# Altium PCB SmartKey.PcbDoc
Units mm, origin at the board's own origin, x right, y up, seen from the top; angles counter-clockwise.
Board outline 60 x 60 mm, 2 copper layers (Top Layer, Bottom Layer); 60 components, 34 nets, 176 pads, 1 vias.
Unrouted connection lines stored in the file: 108.
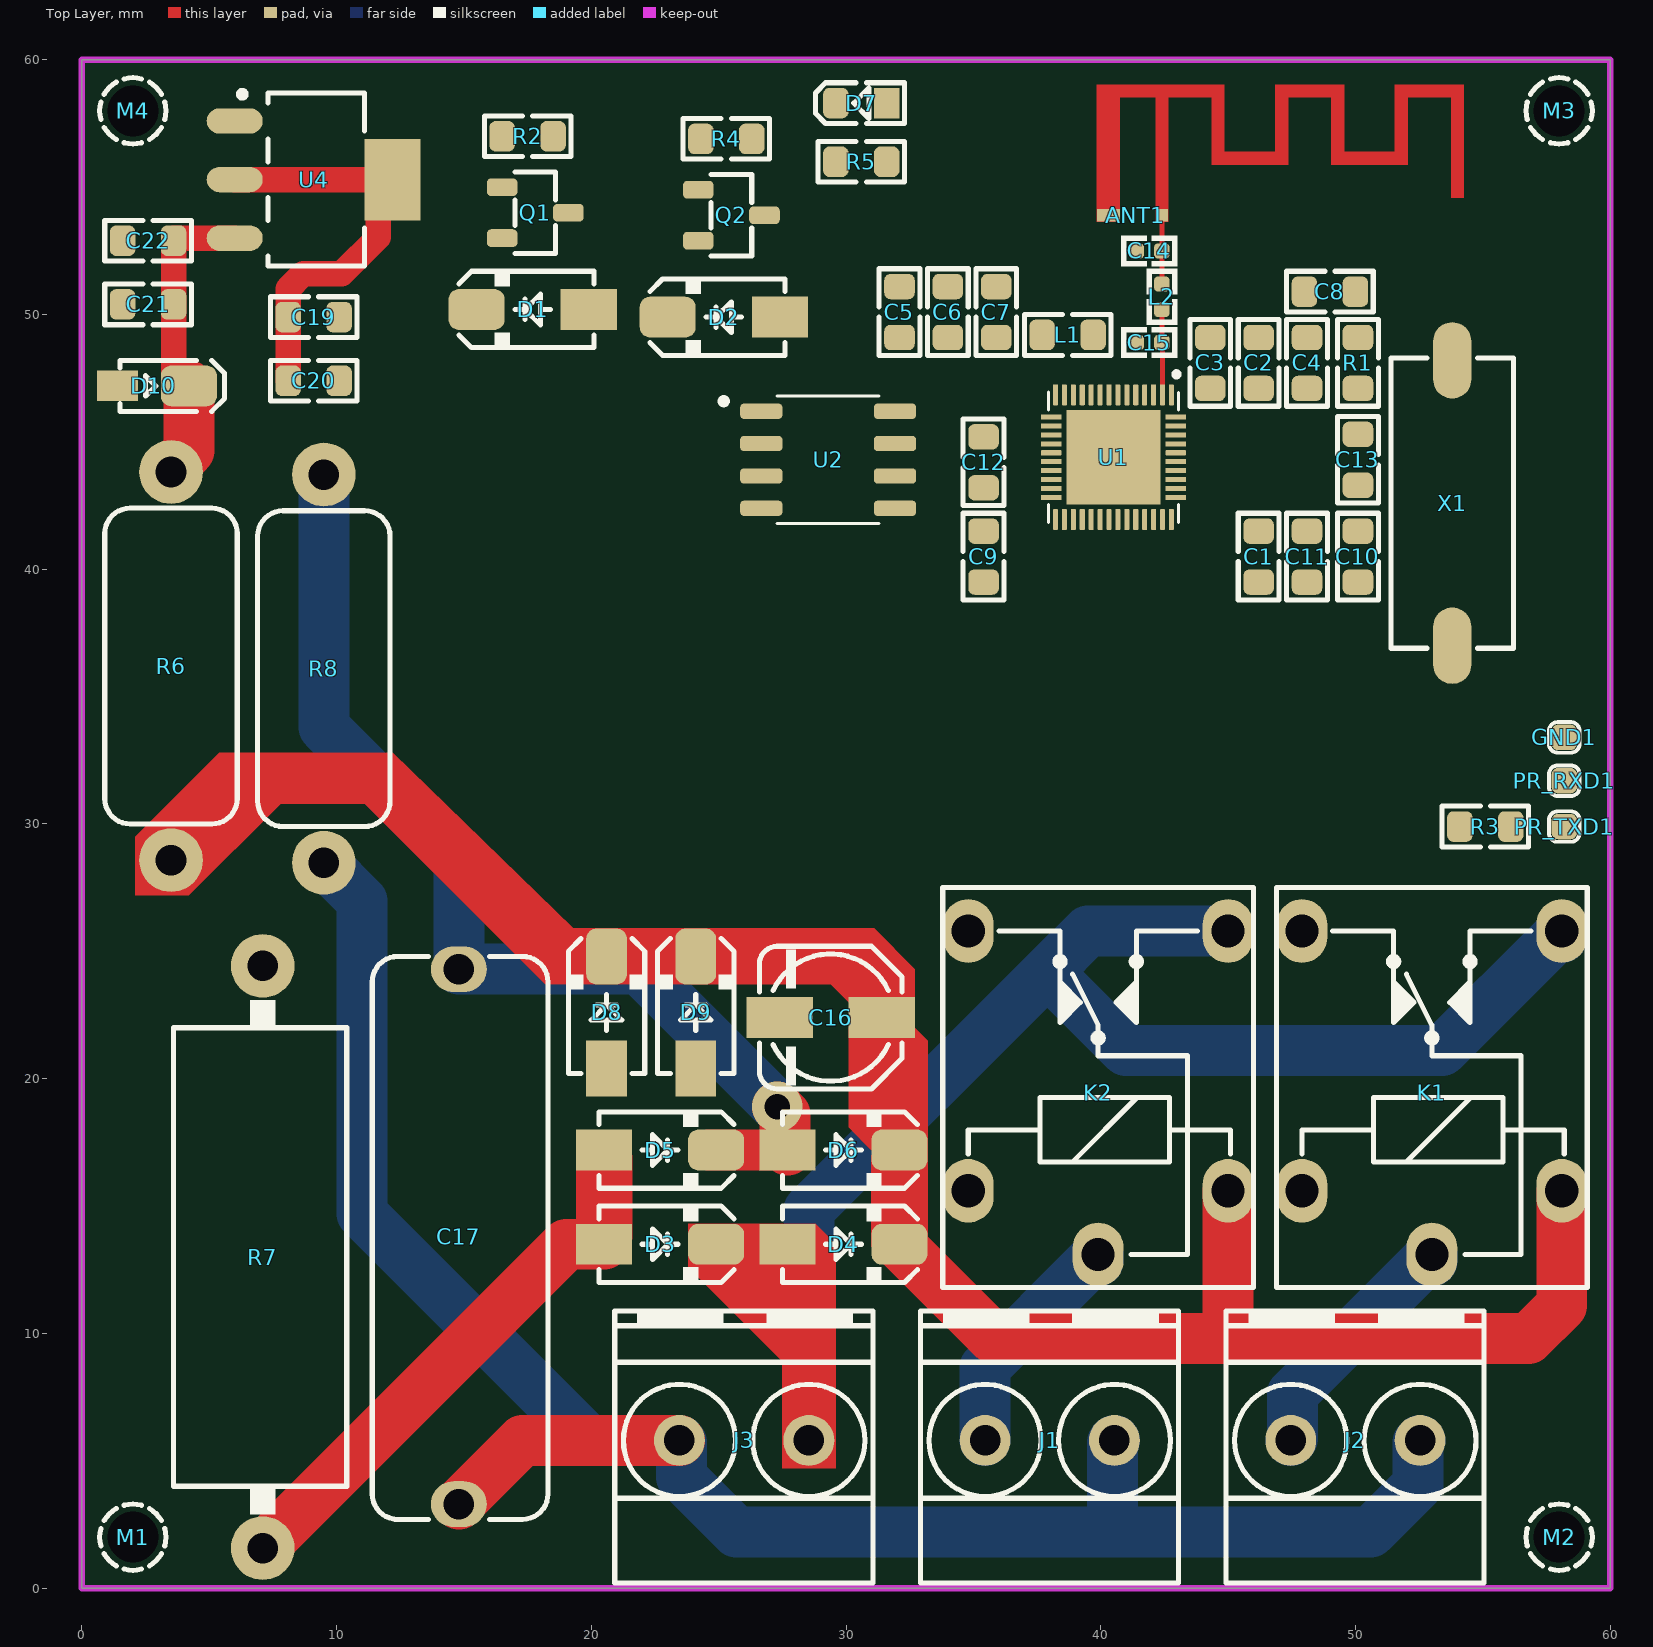
[diagram p0: Top Layer view]
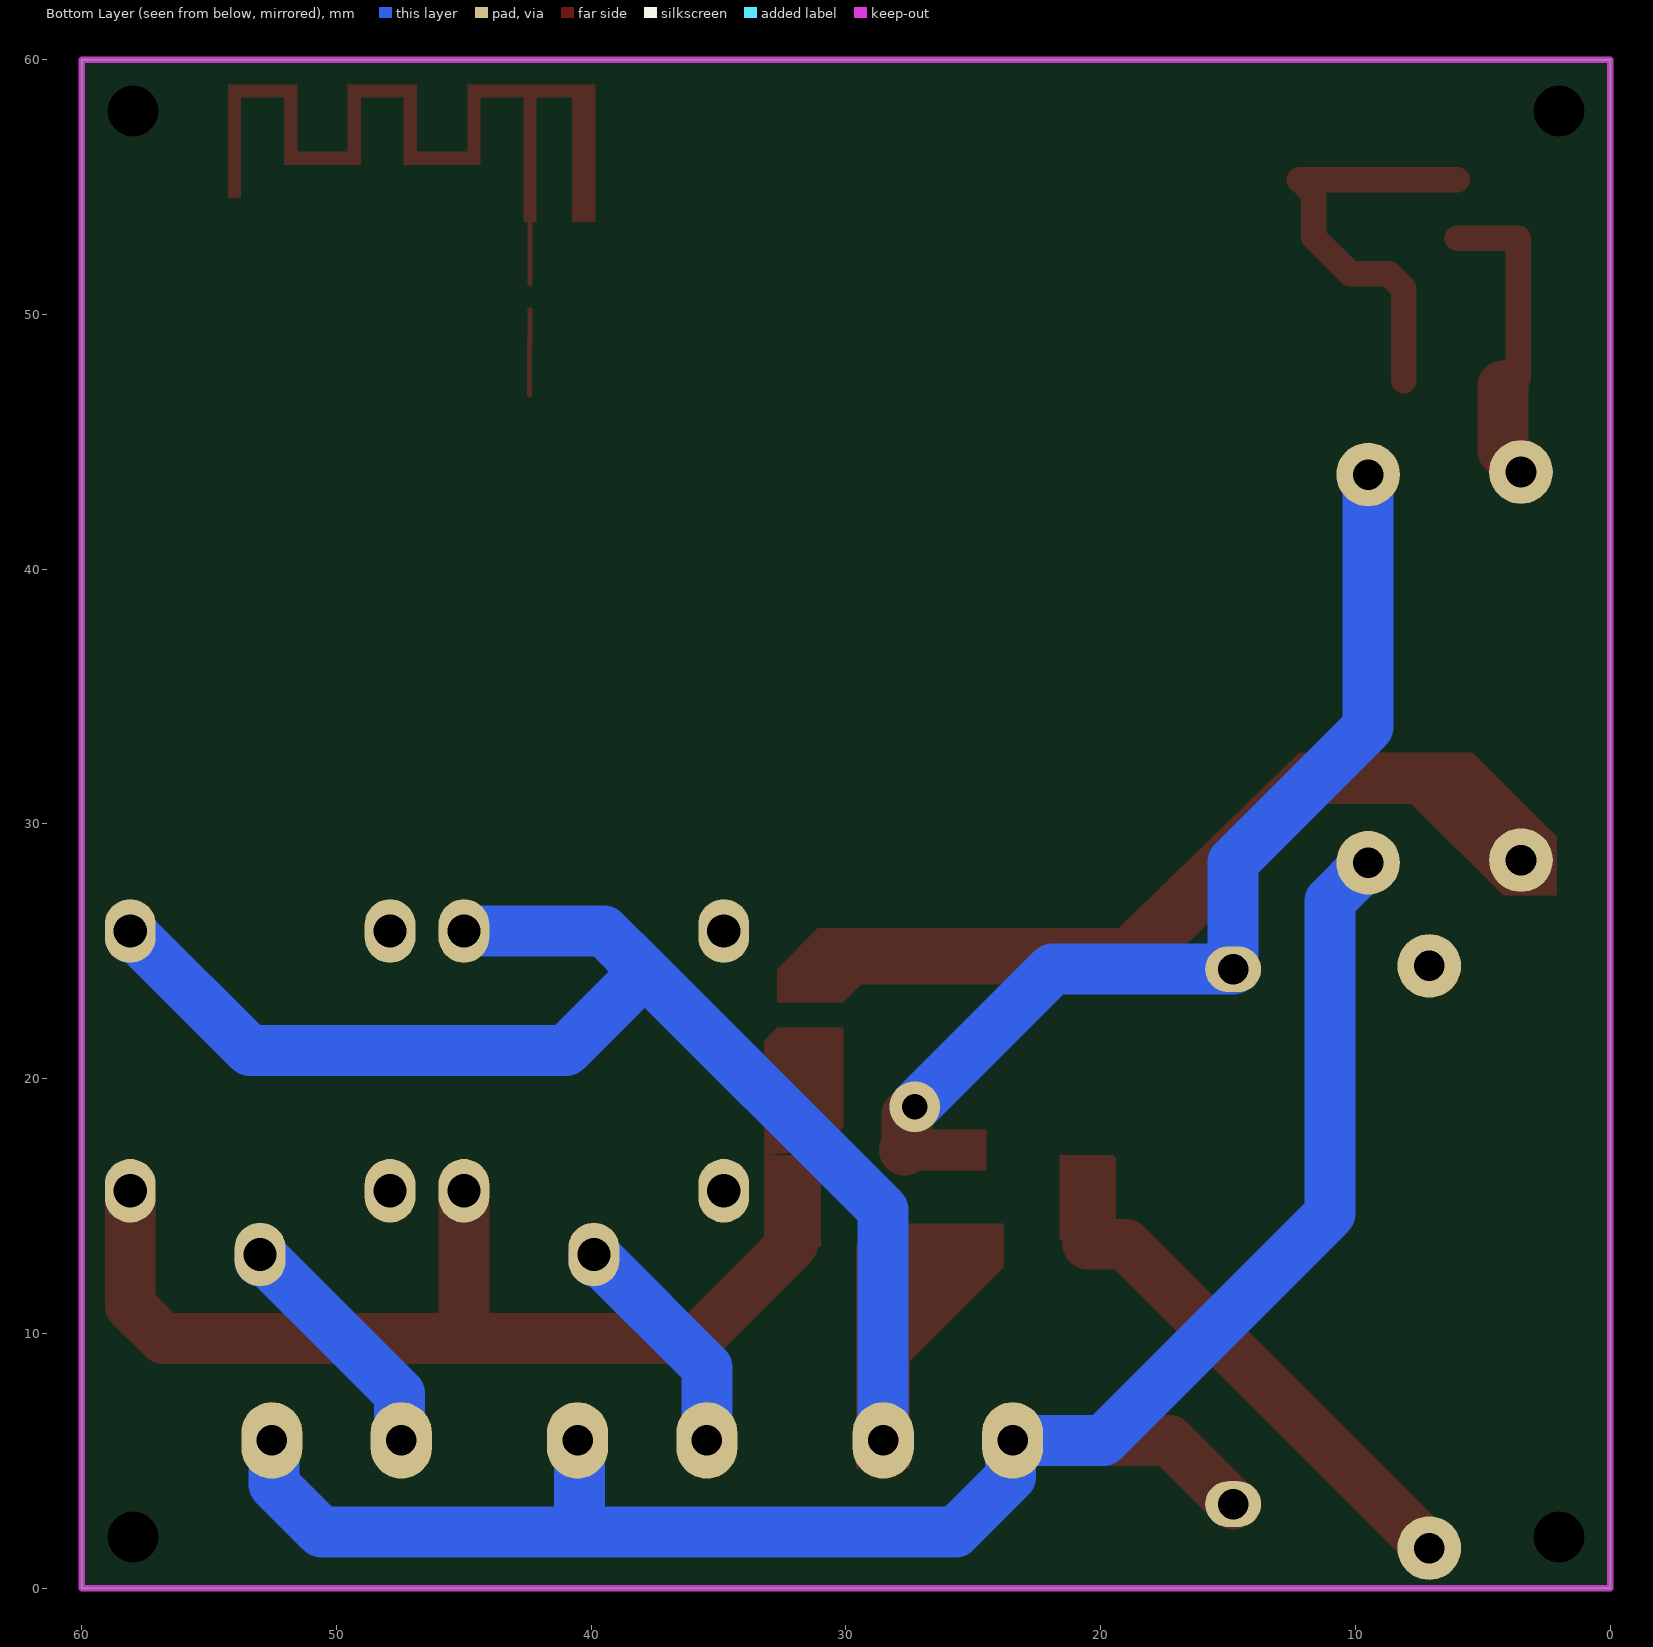
[diagram p1: Bottom Layer view, seen from below]

## Layer stack, top to bottom
Top Solder: solder mask 0.0102, Solder Resist, Dk 3.5
Top Layer: signal copper 0.0356
Dielectric 1: dielectric 0.32, FR-4, Dk 4.8
Bottom Layer: signal copper 0.0356
Bottom Solder: solder mask 0.0102, Solder Resist, Dk 3.5

## Board outline
0,0 60,0 60,60 0,60

## Design rules (kind name [scope] priority, off if disabled: settings)
Clearance [All] p1: gap=0.15 ignorepadtopadclearanceinfootprint=FALSE
DiffPairsRouting [All] p1: maxlimit=0.3 minlimit=0.2 mostfreqgap=0.3 toplayer_minwidth=0.2 toplayer_maxwidth=0.3 toplayer_prefwidth=0.3 bottomlayer_minwidth=0.2 bottomlayer_maxwidth=0.3 bottomlayer_prefwidth=0.3 maxuncoupledlength=12.7
HoleSize [All] p1: absolutevalues=TRUE maxlimit=10 minlimit=0.5 maxpercent=80.000 minpercent=20.000
HoleToHoleClearance [All] p1: gap=0.3 allowstackedmicrovias=TRUE
PlaneClearance [All] p1: clearance=0.3
PlaneConnect [All] p1: pad.planeconnectstyle=Relief pad.reliefexpansion=0.5 pad.reliefentries=4 pad.reliefconductorwidth=0.4 pad.reliefairgap=0.3 via.planeconnectstyle=Direct via.reliefexpansion=0.5 via.reliefentries=4 via.reliefconductorwidth=0.4 via.reliefairgap=0.3
PolygonConnect PolygonConnect_Via [All vs IsVia] p1: connectstyle=Direct reliefconductorwidth=0.254 reliefentries=4 polygonreliefangle="90 Angle" airgapwidth=0.254
PolygonConnect PolygonConnect_Pad [All] p2: thpad.connectstyle=Relief thpad.reliefconductorwidth=0.4 thpad.reliefentries=4 thpad.polygonreliefangle="90 Angle" thpad.airgapwidth=0.3 smdpad.connectstyle=Direct smdpad.reliefconductorwidth=0.4 smdpad.reliefentries=4 smdpad.polygonreliefangle="90 Angle" smdpad.airgapwidth=0.3 via.connectstyle=Relief via.reliefconductorwidth=0.4 via.reliefentries=4 via.polygonreliefangle="90 Angle" via.airgapwidth=0.3
RoutingVias [All] p1: holewidth=0.3 width=0.5 viastyle="Through Hole" minholewidth=0.3 minwidth=0.5 maxholewidth=5 maxwidth=10
SolderMaskExpansion [All] p1: expansion=0.102 istentingtop=FALSE
Width [All] p1: maxlimit=10 minlimit=0.15 preferedwidth=0.15
25 further rules are at their usual default settings.

## Components (designator, comment, footprint, x,y, rotation, side; value= is the part's Value field where it differs from the comment)
ANT1 "Antenna" ANT_PCB_2P4G_IFA 42.4,53.9 r0 top net-tie
C1 "100nF" C0805 46.2,40.5 r90 top
C2 "1uF" C0805 46.2,48.1 r90 top
C3 "10uF" C0805 44.3,48.1 r90 top
C4 "3.3nF" C0805 48.1,48.1 r270 top
C5 "100nF" C0805 32.1,50.1 r90 top
C6 "1uF" C0805 34,50.1 r90 top
C7 "10uF" C0805 35.9,50.1 r90 top
C8 "10nF" C0805 49,50.9 r180 top
C9 "1uF" C0805 35.4,40.499 r90 top
C10 "22uF" C0805 50.1,40.5 r270 top
C11 "100nF" C0805 48.099,40.5 r90 top
C12 "100nF" C0805 35.4,44.2 r90 top
C13 "22uF" C0805 50.1,44.3 r90 top
C14 "TBD" C0402 41.9,52.5 r0 top
C15 "TBD" C0402 41.9,48.9 r0 top
C16 "47uF" C_EL_5 29.4,22.4 r180 top
C17 "1uF/400V" C_PLY_22X7 14.8,13.8 r90 top
C19 "10uF" C0805 9.1,49.9 r0 top
C20 "100nF" C0805 9.1,47.4 r0 top
C21 "100nF" C0805 2.6,50.4 r180 top
C22 "10uF" C0805 2.6,52.9 r180 top
D1 "1N4007" D_SMA 17.7,50.2 r180 top
D2 "1N4007" D_SMA 25.2,49.9 r180 top
D3 "1N4007" D_SMA 22.7,13.5 r0 top
D4 "1N4007" D_SMA 29.9,13.5 r0 top
D5 "1N4007" D_SMA 22.7,17.2 r0 top
D6 "1N4007" D_SMA 29.9,17.2 r0 top
D7 "LED805BLU" LED0805BLU 30.6,58.3 r180 top
D8 "ZENER24V0" D_SMA 20.6,22.6 r90 top
D9 "ZENER24V0" D_SMA 24.1,22.6 r90 top
D10 "ZENER5V0" D_SOD123W 3,47.2 r0 top
GND1 "TESTPOINT_SMD" TPSMD_S1 58.2,33.4 r90 top value=VALUE
J1 "CONN_TB2" TBG_2 38,5.8 r0 top locked
J2 "CONN_TB2" TBG_2 50,5.8 r0 top locked
J3 "CONN_TB2" TBG_2 26,5.8 r0 top locked
K1 "RELAY_SPDT" REL_SPDT_5_1512 53,15.6 r180 top
K2 "RELAY_SPDT" REL_SPDT_5_1512 39.9,15.6 r180 top
L1 "2nH" L0805 38.7,49.2 r0 top
L2 "TBD" L0402 42.4,50.7 r270 top
M1 "DNP/MH" PSPMH2 2,2 r0 top locked
M2 "DNP/MH" PSPMH2 58,2 r0 top locked
M3 "DNP/MH" PSPMH2 58,58 r0 top locked
M4 "DNP/MH" PSPMH2 2,58 r0 top locked
PR_RXD1 "TESTPOINT_SMD" TPSMD_S1 58.2,31.7 r90 top value=VALUE
PR_TXD1 "TESTPOINT_SMD" TPSMD_S1 58.2,29.9 r90 top value=VALUE
Q1 "C945" SOT23_3 17.8,54 r0 top
Q2 "C945" SOT23_3 25.5,53.9 r0 top
R1 "20K" R0805 50.1,48.1 r270 top
R2 "1K" R0805 17.5,57 r0 top
R3 "499" R0805 55.1,29.9 r0 top
R4 "1K" R0805 25.3,56.9 r0 top
R5 "10K" R0805 30.6,56 r0 top
R6 "1K/1W" R1W_AX06 3.5,36.2 r90 top
R7 "68R" R3W_AX09 7.1,13 r270 top
R8 "1M/1W" R1W_AX06 9.5,36.1 r90 top
U1 "ESP32-D0WD" QFN35P500X500X90-49N 40.5,44.4 r270 top
U2 "GD25Q32CTIGR" SOIC127P600X175-8N 29.3,44.3 r0 top
U4 "AMS1117" SOT223_4 9.2,55.3 r0 top
X1 "40MHz" XTL_2_11X5 53.8,42.6 r270 top

## Footprints (in the part's own frame and the unit in brackets; to place one, negate y for a bottom-side part, rotate by r counter-clockwise, add the part's x,y. Pads: shape width x height; smd on the part's side, far side on the other; paste and mask are expansions set on the pad)
ANT_PCB_2P4G_IFA [mm] "ANTENNA, Microstrip, IFA, 2.4GHz"
  rect 0.5x0.5 smd mask+0.102: 1(0,0)
  rect 0.9x0.5 smd mask+0.102: 2(-2.097,0)
  Top Layer region: 7.153,1.987 7.153,5.127 6.653,5.127 6.653,1.987
  Top Layer region: 4.453,4.627 4.453,5.127 7.153,5.127 7.153,4.627
  Top Layer region: 1.953,1.987 1.953,2.487 4.953,2.487 4.953,1.987
  Top Layer region: 1.953,5.127 1.953,1.987 2.453,1.987 2.453,5.127
  Top Layer region: 6.653,1.987 6.653,2.487 9.653,2.487 9.653,1.987
  Top Layer region: 9.653,5.127 9.653,1.987 9.153,1.987 9.153,5.127
  Top Layer region: 9.153,4.627 9.153,5.127 11.853,5.127 11.853,4.627
  Top Layer region: 4.953,5.127 4.953,1.987 4.453,1.987 4.453,5.127
  Top Layer region: -2.547,-0.263 -2.547,5.127 -1.647,5.127 -1.647,-0.263
  Top Layer region: 11.853,0.687 11.853,5.127 11.353,5.127 11.353,0.687
  Top Layer region: -0.247,-0.263 -0.247,5.127 0.253,5.127 0.253,-0.263
  Top Layer region: -2.547,4.627 -2.547,5.127 2.453,5.127 2.453,4.627
C0402 [mm] "CHIP Capacitor, 1.0X0.5mm, 0402"
  rrect50% 0.6x0.6 smd mask+0.075: 1(-0.5,0) 2(0.5,0)
  silkscreen extent -1.1,-0.6 1.1,0.6, body extent -0.5,-0.26 0.5,0.27, height 0.36
C0805 [mm] "CHIP Capacitor, 2.0X1.3mm, 0805"
  rrect50% 1x1.2 smd paste-0.1 mask+0.075: 1(-1,0) 2(1,0)
  Top Layer pour cut-out: -0.5,0.8 0.5,0.8 0.5,-0.8 -0.5,-0.8
  silkscreen extent -1.7,-0.8 1.7,0.8, body extent -1,-0.62 1,0.63, height 1
C_EL_5 [mm] "Electrolytic Cap, D: 5.0mm, L: 5.8mm, Size C"
  rect 2.6x1.6 smd: 1(-2,0) 2(2,0)
  Top Layer pour cut-out: 1.905,2.667 1.905,-2.7 -1.905,-2.7 -1.905,2.667
  silkscreen extent -2.8,-2.8 2.8,2.8, body extent -3,-2.65 3,2.65
C_PLY_22X7 [mm] "CAP, POLYESTER, 33.0X7.0mm pitch: 20.0mm, 0.68uF 400V"
  oval 1.8x2.2 hole 1.2: 1(-10.5,0) 2(10.5,0)
  silkscreen extent -11.1,-3.5 11,3.4, body extent -13,-3.9 13,3.9, height 19
D_SMA [mm] "SMA Molded Diode, 2-Leads, Body 4.3x2.7mm, SOD-128"
  rect 2.2x1.6 smd paste-0.1: 1(-2.2,0)
  rrect50% 2.2x1.6 smd paste-0.1: 2(2.2,0)
  silkscreen extent -2.4,-1.5 2.9,1.5, body extent -2.75,-1.4 2.75,1.4, height 2.6
D_SOD123W [mm] "PowerDI-123, SOD123, DO-213AA, 1206D"
  rect 1.6x1.2 smd paste-0.1 mask+0.1: 1(-1.6,0)
  rrect50% 2.2x1.6 smd paste-0.1 mask+0.1: 2(1.2,0)
  Top Layer pour cut-out: -1.016,1.1 -1.016,-1.1 1.016,-1.1 1.016,1.1
  silkscreen extent -1.5,-1 2.6,1, body extent -1.95,-0.97 1.95,0.96, height 1
L0402 [mm] "INDUCTOR, FERRITE BEAD, 0402, 1.0X0.5mm"
  rrect50% 0.6x0.6 smd mask+0.075: 1(-0.5,0) 2(0.5,0)
  silkscreen extent -1.1,-0.6 1.1,0.6, body extent -0.5,-0.25 0.5,0.25, height 0.6
L0805 [mm] "INDUCTOR, FERRITE BEAD, 0805, 2.0X1.3mm"
  rrect50% 1x1.2 smd paste-0.1 mask+0.075: 1(-1,0) 2(1,0)
  Top Layer pour cut-out: -0.5,0.8 0.5,0.8 0.5,-0.8 -0.5,-0.8
  silkscreen extent -1.7,-0.8 1.7,0.8, body extent -1,-0.6 1,0.6, height 0.95
LED0805BLU [mm] "LED SMD 0805, BLUE"
  rect 1x1.2 smd paste-2 mask+0.075: 1(-1,0)
  rrect50% 1x1.2 smd paste-2 mask+0.075: 2(1,0)
  Top Layer pour cut-out: -0.5,0.8 0.5,0.8 0.5,-0.8 -0.5,-0.8
  silkscreen extent -1.7,-0.8 1.8,0.8, body extent -1,-0.63 1,0.63, height 0.7
PSPMH2 [mm] "Plastic Spacer mouting, Hole 2mm"
  round 0 hole 2 unplated mask+0.1: ""(0,0)
  Top Layer pour cut-out: 0,1.5 -0.574,1.386 -1.061,1.061 -1.386,0.574 -1.5,0 -1.5,0 -1.386,-0.574 -1.061,-1.061 -0.574,-1.386 0,-1.5 0,-1.5 0.75,-1.299 1.299,-0.75 1.5,0 1.5,0 1.386,0.574 1.061,1.061 0.574,1.386 0,1.5
  silkscreen extent -1.3,-1.3 1.3,1.3
QFN35P500X500X90-49N [mm]
  rrect25% 0.81x0.2 smd: 1(-2.445,2.275) 2(-2.445,1.925) 3(-2.445,1.575) 4(-2.445,1.225) 5(-2.445,0.875) 6(-2.445,0.525) 7(-2.445,0.175) 8(-2.445,-0.175) 9(-2.445,-0.525) 10(-2.445,-0.875) 11(-2.445,-1.225) 12(-2.445,-1.575) 13(-2.445,-1.925) 14(-2.445,-2.275) 25(2.445,-2.275) 26(2.445,-1.925) 27(2.445,-1.575) 28(2.445,-1.225) 29(2.445,-0.875) 30(2.445,-0.525) 31(2.445,-0.175) 32(2.445,0.175) 33(2.445,0.525) 34(2.445,0.875) 35(2.445,1.225) 36(2.445,1.575) 37(2.445,1.925) 38(2.445,2.275)
  rrect25% 0.2x0.81 smd: 15(-1.575,-2.445) 16(-1.225,-2.445) 17(-0.875,-2.445) 18(-0.525,-2.445) 19(-0.175,-2.445) 20(0.175,-2.445) 21(0.525,-2.445) 22(0.875,-2.445) 23(1.225,-2.445) 24(1.575,-2.445) 39(1.575,2.445) 40(1.225,2.445) 41(0.875,2.445) 42(0.525,2.445) 43(0.175,2.445) 44(-0.175,2.445) 45(-0.525,2.445) 46(-0.875,2.445) 47(-1.225,2.445) 48(-1.575,2.445)
  rect 3.7x3.7 smd paste-3: 49(0,0)
  silkscreen extent -3.35,-2.56 2.56,2.57, body extent -2.5,-2.5 2.5,2.5, height 0.9
R1W_AX06 [mm] "RESISTOR 1 WATT, AXIAL0.6"
  round 2.5 hole 1.2: 1(-7.62,0) 2(7.62,0)
  silkscreen extent -6.2,-2.6 6.2,2.6, body extent -7.97,-2.49 7.97,2.51, height 5
R3W_AX09 [mm] "RESISTOR 3 WATT, AXIAL0.9"
  round 2.5 hole 1.2: 1(-11.43,0) 2(11.43,0)
  silkscreen extent -10.1,-3.5 10.1,3.3, body extent -11.83,-3.3 11.83,3.2, height 6.5
R0805 [mm] "CHIP RESISTOR 1/8 WATT ,2.0X1.3mm, 0805, 2012"
  rrect50% 1x1.2 smd paste-0.1 mask+0.075: 1(-1,0) 2(1,0)
  Top Layer pour cut-out: -0.5,0.8 0.5,0.8 0.5,-0.8 -0.5,-0.8
  silkscreen extent -1.7,-0.8 1.7,0.8, body extent -1.15,-0.67 1.15,0.68, height 0.76
REL_SPDT_5_1512 [mm] "RELAY, SPDT, 15.40x12.10x14.0mm, G8QN, SUN HOLD RAM"
  oval 2x2.5 hole 1.3: 1(0,2.5) 2(5.1,-10.2) 3(-5.1,-10.2) 4(-5.1,0) 5(5.1,0)
  silkscreen extent -6.1,-11.9 6.1,3.8, body extent -6,-11.8 6,3.7, height 14
SOIC127P600X175-8N [mm]
  rrect50% 1.66x0.6 smd: 1(-2.625,1.905) 2(-2.625,0.635) 3(-2.625,-0.635) 4(-2.625,-1.905) 5(2.625,-1.905) 6(2.625,-0.635) 7(2.625,0.635) 8(2.625,1.905)
  silkscreen extent -4.22,-2.5 2,2.5, body extent -3,-2.45 3,2.45, height 1.63
SOT23_3 [mm] "SOT-23, Micro3, MO-178, TO-236AB, MO-193C, SuperSOT3, SC-59, 1.5x3mm, Pitch 1.9mm"
  rrect50% 1.2x0.7 smd paste-0.05 mask+0.1: 1(-1.3,1) 2(-1.3,-1) 3(1.3,0)
  silkscreen extent -0.8,-1.6 0.8,1.6, body extent -1.32,-1.5 1.32,1.5, height 1.08
SOT223_4 [mm] "SOT223, 4-Leads, Body 6.5x3.5mm, Pitch 2.30mm"
  oval 2.2x1 smd: 1(-3.2,2.3) 2(-3.2,0) 3(-3.2,-2.3)
  rect 2.2x3.2 smd paste-5: 4(3,0)
  Top Layer pour cut-out: -1.7,3.556 1.7,3.556 1.7,-3.556 -1.7,-3.556
  silkscreen extent -3.02,-3.4 1.9,3.47, body extent -3.5,-3.25 3.5,3.25, height 1.7
TBG_2 [mm] "Terminal Block Green"
  round 2 / inner round 2 / far side oval 2.4x3 hole 1.2: 1(-2.54,0) 2(2.54,0)
  silkscreen extent -5.08,-5.6 5.05,5.08, body extent -5,-5.5 5,5, height 14
TPSMD_S1 [mm] "Test Point, SMD Pad, Circle, 1mm X 1mm"
  rrect50% 1x1 smd paste-1.016 mask+0.025: 1(0,0)
  silkscreen extent -0.6,-0.6 0.6,0.6
XTL_2_11X5 [mm] "SMD crystal resonator, ABL, ABLS, HC-49, HC49 11X4.5MM"
  oval 3x1.5 smd: 1(-5.6,0) 2(5.6,0)
  silkscreen extent -5.7,-2.4 5.7,2.4, body extent -6.4,-2.41 6.4,2.42, height 4.3

## Part data
ANT1: library part ANT_PCB_2P4G_IFA, "Antenna,Microstrip, 2.4GHz", MANF=MANF, MANF_P#=MANF_P#
C1 C2 C3 C4 C5 C6 C7 C8 C9 C10 C11 C12 C13 C14 C15: library part CAP_SMD_MLCC_0603, "CAP, MLCC, -F, -V, MATERIAL, -%, 0201", ASSEMBLY=ASSEMBLY, MANF=-, MANF_P#=MANF_PART#, PARAM="-, -%", PARAM2=-V, PRICE="100= 1$"
C16: library part CAP_SMD_EL, "CAP, THD, ELEC,", ASSEMBLY=ASSEMBLY, DESC=DESCRIPTION, DIST#=MOUSER, MANF=MANF, MANF_P#=MANF_PART#, PARAM=20%, PARAM2=-V, PRICE="10= -$"
C17: library part CAP_THD_FILM_POLYESTER, "CAP, FILM,", ASSEMBLY=ASSEMBLY, DESC="CAP, FILM,", MANF=MANF, MANF_P#=MANF_PART#, PARAM2=400V, PRICE="100= 1$"
C19 C20 C21 C22: library part CAP_SMD_MLCC_0805, "CAP, MLCC, -F, -V, MATERIAL, -%, 0201", ASSEMBLY=ASSEMBLY, MANF=-, MANF_P#=MANF_PART#, PARAM="-, -%", PARAM2=-V, PRICE="100= 1$"
D1 D2 D3 D4 D5 D6: library part DIODE_SMD_1N4007, "DIODE, GENERAL PURPOSE, 1000V/1A", ASSEMBLY=ASSEMBLY, DESC=DESCRIPTION, MANF=Kingtronics, MANF_P#=M7, PARAM="1000V VRRM", PARAM2=1A, PRICE=PRICE
D7: library part LED_SMD_0805_BLU, "LED, SMD, 0805, BLUE", ASSEMBLY=ASSEMBLY, DESC=DESCRIPTION, MANF=MANF, MANF_P#=MANF_PART#, PARAM2=2.2V, PRICE=36t@Javan
D8 D9: library part DIODE_SMD_ZENER_SMAZ5V6, "DIODE, ZENER, 1W, 5.6V", ASSEMBLY=ASSEMBLY, DESC=DESCRIPTION, MANF=Diodes, MANF_P#=SMAZ5V6-13-F, PARAM=5.6V, PARAM2="1W, 2Ohm, -55~150oC", PRICE=0.5$
D10: library part DIODE_SMD_ZENER_BZT52HC5V1, "DIODE, ZENER, 1W, 5.1V", ASSEMBLY=ASSEMBLY, DESC=DESCRIPTION, MANF=Diodes, MANF_P#=BZT52HC5V1WF-7, PARAM=5.1V, PARAM2="1W, 4Ohm, -55~150oC", PRICE=0.25$
GND1 PR_RXD1 PR_TXD1: "TEST POINT", MANF=MANF, MANF_P#=MANF_P#
J1 J2 J3: "CONN, TERMINAL BLOCK, 5.08mm pitch"
K1 K2: library part RELAY_SPST_5_1512_G8QN, "Relay, SPDT, 5P, 15.4X12.1mm, 16V/30A", MANF=OMRON, MANF_P#=G8QN, PARAM="12V, 50mA", PARAM2="16VDC, 30A", PRICE=PRICE
L1 L2: library part IND_SMD, "INDUCTOR, SMD"
M1 M2 M3 M4: library part PSPMH2, "Plastic Spacer mouting, Hole 2mm", ASSEMBLY=DNP
Q1 Q2: library part NPN_C945_SMD, "BJT, NPN, 50v, 0.15A, THD, TO92, BC945", MANF=-, MANF_P#="C945, 2SC945, BC945", PARAM="50v, 0.15A", PARAM2=200mW
R1 R2 R3 R4: library part RES_SMD_0603, "RESISTOR, SMD", ASSEMBLY=ASSEMBLY, DESC=DESCRIPTION, DIST#=MOUSER, MANF=-, MANF_P#=-, PARAM=-W, PARAM2=1%, PRICE="100= 0.5$"
R5: library part RES_SMD_0805, "RESISTOR, SMD", ASSEMBLY=ASSEMBLY, DESC=DESCRIPTION, DIST#=MOUSER, MANF=-, MANF_P#=-, PARAM=-W, PARAM2=1%, PRICE="100= 0.5$"
R6 R7 R8: library part RES_THD, "RESISTOR, THD", ASSEMBLY=ASSEMBLY, DESC=DESCRIPTION, DIST#=MOUSER, MANF="KOA SPEER", MANF_P#=RK73H1ETTP4701F, PARAM=0.063W, PARAM2=1%, PRICE="100= 0.5$"
U1: "ESP32 is a single 2.4 GHz Wi-Fi-and-Bluetooth combo chip designed with the TSMC ultra-low-power 40 nm technology. It is designed to achieve the best power and RF performance, showing robustness, versatility and reliability in a wide variety of applications and power scenarios.", Package=None, Availability=Unavailable, MF="{'manufacturer': u'Espressif Systems'}", MP=ESP32-D0WD, PRICE=None
U2: "NOR FLASH", Package=None, Availability=Unavailable, MF="{'manufacturer': u'GigaDevice Semiconductor (HK) Limited'}", MP=GD25Q32CTIGR, PRICE=None
X1: library part XTL_2_HC49_SMD, "Crystal MOST POPULAR ABL HC49 PACKAGE"

## Via types
v1: diameter 2, hole 1, Top Layer to Bottom Layer, tented both sides, 1 vias

## Nets (pads, with @x,y where several pads share a name; then routed paths per layer and width w, separated by ;. In a path a pad name is that pad's centre, name@x,y a point inside that pad or via, vN(x,y) a via of type N, cw(c..) or ccw(c..) an arc to the next point about the centre after c; other vN are vias at no path point)
+3V3: C1.2 C2.2 C3.2 C5.2 C6.2 C7.2 C11.2 C12.2 C19.1 C20.1 L1.2 R5.1 U1.1 U1.19 U1.37 U1.43 U1.46 U4.2 U4.4 | length 16.7
  Top Layer w1: U4.2 U4.4 11.639,54.739 11.639,53.039 10.2,51.6 8.686,51.6 8.1,51.014 C19.1 C20.1
+5V0: C21.1 C22.1 D10.2 R6.2 U4.3 | length 12.3
  Top Layer w1: D10.2 3.9,47.2 3.6,47.5 C21.1 C22.1 3.6,53 3.7,53 U4.3
  Top Layer w2: R6.2 3.5,43.955 4.2,44.655 D10.2
+24V0: C16.1 D1.2 D2.2 D4.2 D6.2 D8.2 D9.2 K1.4 K2.4 R6.1 | length 38.4
  Top Layer w2: D4.2 35.8,9.8 45,9.8 ; K2.4 45,9.8 ; K1.4 58.1,11.1 56.8,9.8 45,9.8
GND: ANT1.2 C1.1 C2.1 C3.1 C5.1 C6.1 C7.1 C8.2 C9.1 C10.2 C11.1 C12.1 C13.2 C14.1 C15.1 C16.2 C19.2 C20.2 C21.2 C22.2 D7.2 D8.1 D9.1 D10.1 GND1.1 Q1.2 Q2.2 R7.1 U1.49 U2.4 U4.1
NetANT1_1: ANT1.1 C14.2 L2.1 | length 2.7
  Top Layer w0.2: L2.1 C14.2 ANT1.1
NetC4_1: C4.1 C8.1 R1.1 U1.48
NetC4_2: C4.2 R1.2 U1.47
NetC10_1: C10.1 U1.44 X1.2
NetC13_1: C13.1 U1.45 X1.1
NetC15_2: C15.2 L2.2 U1.2 | length 3.4
  Top Layer w0.2: L2.2 C15.2 42.425,48.875 U1.2
NetC17_2: C17.2 D5.2 D6.1 R8.2 | length 38.2
  Top Layer w2: v1(27.3,18.9) 27.6,18.6 27.6,17.3 D6.1
  Bottom Layer w2: R8.2 9.5,33.8 14.8,28.5 C17.2 21.9,24.3 v1(27.3,18.9)
NetD1_1: D1.1 K1.5 Q1.3
NetD2_1: D2.1 K2.5 Q2.3
NetD3_1: D3.1 D5.1 R7.2 | length 18.3
  Top Layer w2: R7.2 19.03,13.5 D3.1
NetD7_1: D7.1 R5.2
NetJ1_1: J1.1 K2.1 | length 9.3
  Bottom Layer w2: J1.1 35.46,8.66 39.65,12.85 39.9,12.85 K2.1
NetJ2_1: J2.1 K1.1 | length 9.7
  Bottom Layer w2: J2.1 47.537,5.877 47.537,7.637 52.75,12.85 53,12.85 K1.1
NetL1_1: L1.1 U1.3 U1.4
NetPR_RXD1_1: PR_RXD1.1 U1.40
NetPR_TXD1_1: PR_TXD1.1 R3.2
NetQ1_1: Q1.1 R2.1
NetQ2_1: Q2.1 R4.1
NetR3_1: R3.1 U1.41
Null: C17.1 J1.2 J2.2 J3.1 R8.1 | length 77.7
  Top Layer w2: C17.1 17.3,5.8 J3.1
  Bottom Layer w2: R8.1 11,26.98 11,14.7 19.9,5.8 J3.1 23.537,5.723 23.537,4.363 25.7,2.2 40.463,2.2 ; J1.2 40.463,5.723 40.463,2.2 ; J2.2 52.463,5.723 52.463,4.063 50.6,2.2 40.463,2.2
Phase: D3.2 D4.1 J3.2 K1.3 K2.3 | length 53.6
  Bottom Layer w2: J3.2 28.54,14.84 37.9,24.2 ; K2.3 39.5,25.8 37.9,24.2 ; K1.3 58.1,25.55 57.85,25.55 53.4,21.1 41,21.1 37.9,24.2
Relay_1: R2.2 U1.23
Relay_2: R4.2 U1.22
SCK/CLK: U1.31 U2.6
SCS/CMD: U1.30 U2.1
SD1/SD1: U1.33 U2.5
SDO/SD0: U1.32 U2.2
SHD/SD2: U1.28 U2.7
SWP/SD3: U1.29 U2.3
VDD_SDIO: C9.2 U1.26 U2.8
pads on no net: K1.2 K2.2 M1. M2. M3. M4. U1.5 U1.6 U1.7 U1.8 U1.9 U1.10 U1.11 U1.12 U1.13 U1.14 U1.15 U1.16 U1.17 U1.18 U1.20 U1.21 U1.24 U1.25 U1.27 U1.34 U1.35 U1.36 U1.38 U1.39 U1.42

## Keep-outs
Keep-Out Layer:
  the board outline again, w0.254

## Other copper
Top Layer:
  region net +24V0: 4.2,27.2 7.8,30.8 11.1,30.8 18.2,23.7 20.2,23.7 20.2,25.9 19.3,25.9 12.2,32.8 5.4,32.8 2.1,29.5 2.1,27.2
  region net +24V0: 30.1,23 29.4,23.7 19.8,23.7 19.8,25.9 31.1,25.9 32.7,24.3 32.7,23
  region net +24V0: 31,17.2 30.1,18.1 30.1,22 32.7,22 33.2,21.5 33.2,17
  region net +24V0: 31,13.4 31,17 33.2,17 33.2,13.3
  region net NetC17_2: 27.5,18 24.5,18 24.5,16.4 27.5,16.4
  region net NetD3_1: 19.4,13.5 19.4,16.9 19.5,17 21.6,17 21.6,13.7 21.5,13.6
  region net Phase: 27.5,4.7 27.5,8.9 23.8,12.6 23.8,14.3 28.8,14.3 29.6,13.5 29.6,4.7